# Altium PCB Board.PcbDoc
Units mm, origin at the board's own origin, x right, y up, seen from the top; angles counter-clockwise.
Board outline 142.08 x 55.74 mm, 2 copper layers (Top Layer, Bottom Layer); 54 components, 67 nets, 258 pads, 16 vias.
Unrouted connection lines stored in the file: 171.
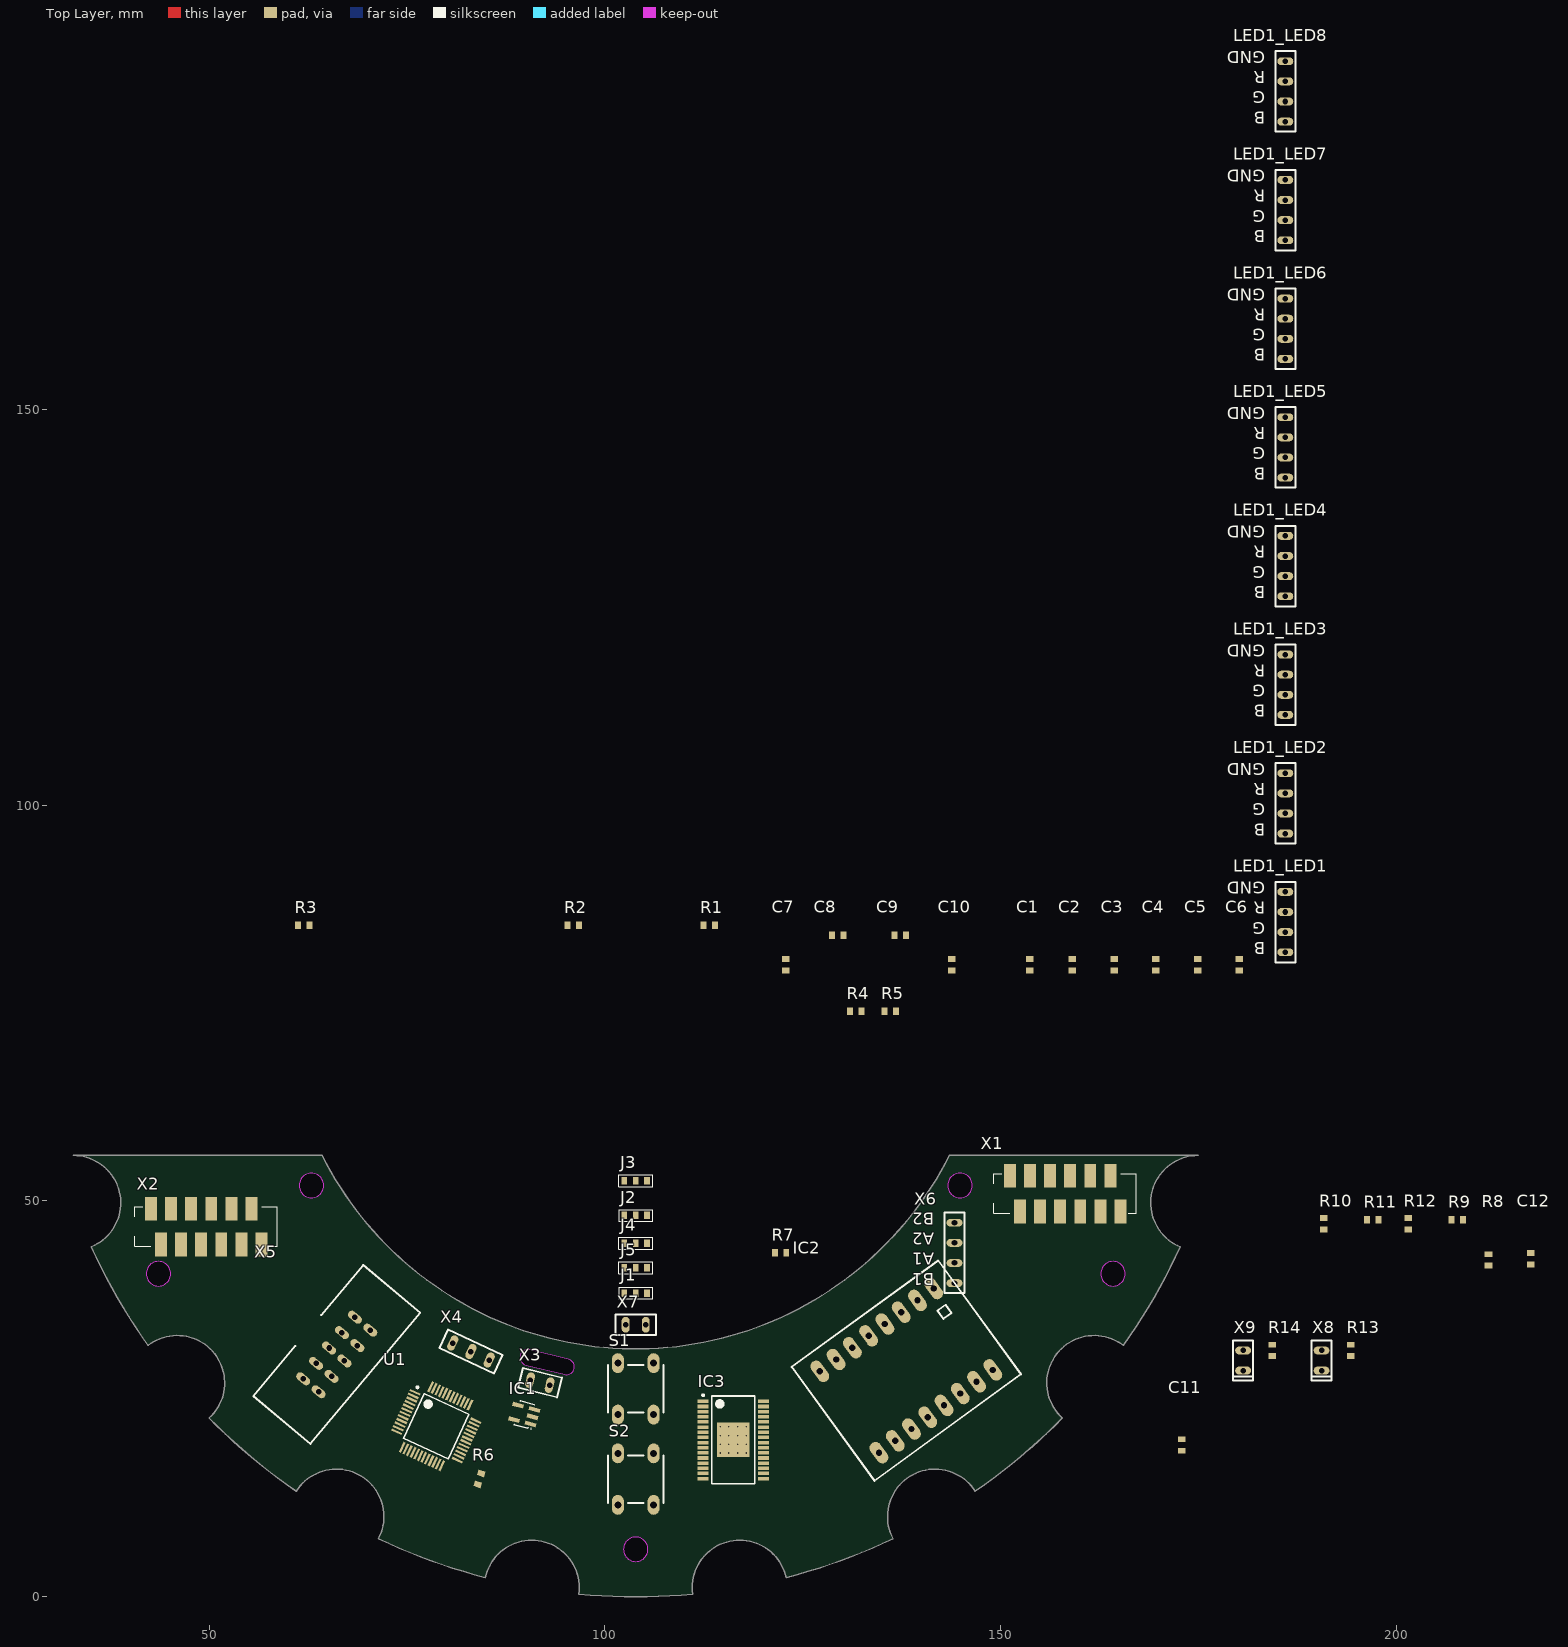
[diagram p0: Top Layer view]
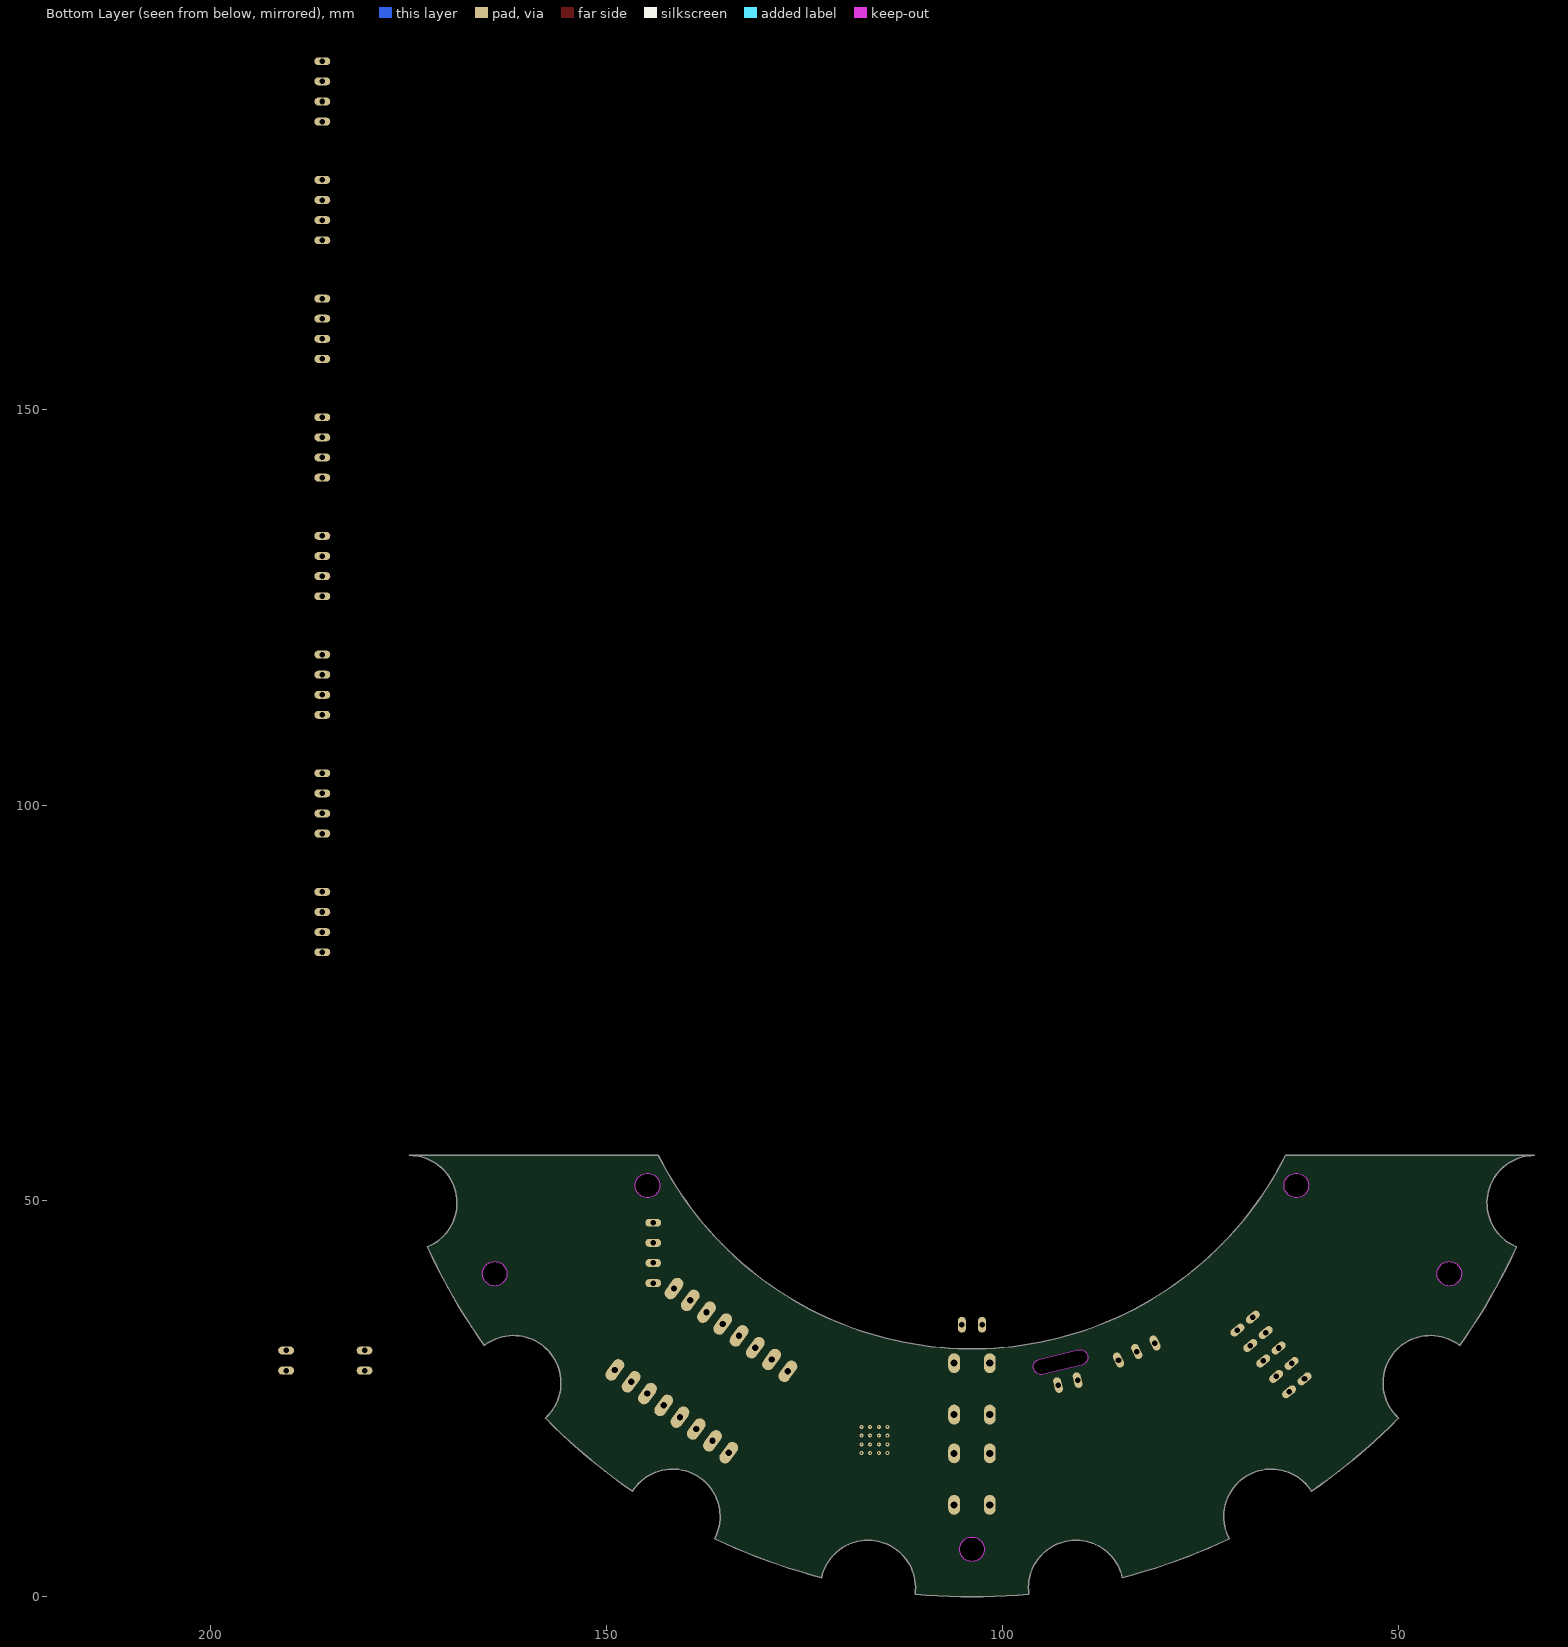
[diagram p1: Bottom Layer view, seen from below]

## Layer stack, top to bottom
Top Solder: solder mask 0.0102, Solder Resist, Dk 3.5
Top Layer: signal copper 0.0356
Dielectric 1: dielectric 0.32, FR-4, Dk 4.8
Bottom Layer: signal copper 0.0356
Bottom Solder: solder mask 0.0102, Solder Resist, Dk 3.5

## Board outline
50.009,22.572 ccw(c103.886,75.606) 61.013,13.339 cw(c66.086,10.135) 71.397,7.343 ccw(c103.886,75.606) 84.895,2.43 cw(c90.758,1.155) 96.704,0.348 ccw(c103.886,75.606) 111.068,0.348 cw(c117.014,1.155) 122.877,2.43 ccw(c103.886,75.606) 136.375,7.343 cw(c141.686,10.135) 146.759,13.339 ccw(c103.886,75.606) 157.763,22.572 cw(c161.799,27.012) 165.47,31.757 ccw(c103.886,75.606) 172.653,44.197 cw(c174.927,49.75) 174.927,55.75 143.487,55.75 cw(c103.886,75.606) 64.285,55.75 32.845,55.75 cw(c32.845,49.75) 35.119,44.197 ccw(c103.886,75.606) 42.302,31.757 cw(c45.973,27.012)
cut-out: 90.041,29.266 94.899,28.084 ccw(c95.135,29.056) 95.372,30.027 90.513,31.209 ccw(c90.277,30.238)
cut-out: 42.061,40.806 ccw(c43.611,40.806) 43.611,39.256 ccw(c43.611,40.806) 45.161,40.806 ccw(c43.611,40.806) 43.611,42.356 ccw(c43.611,40.806)
cut-out: 61.373,51.956 ccw(c62.923,51.956) 62.923,50.406 ccw(c62.923,51.956) 64.473,51.956 ccw(c62.923,51.956) 62.923,53.506 ccw(c62.923,51.956)
cut-out: 102.336,6.006 ccw(c103.886,6.006) 103.886,4.456 ccw(c103.886,6.006) 105.436,6.006 ccw(c103.886,6.006) 103.886,7.556 ccw(c103.886,6.006)
cut-out: 143.299,51.956 ccw(c144.849,51.956) 144.849,50.406 ccw(c144.849,51.956) 146.399,51.956 ccw(c144.849,51.956) 144.849,53.506 ccw(c144.849,51.956)
cut-out: 162.611,40.806 ccw(c164.161,40.806) 164.161,39.256 ccw(c164.161,40.806) 165.711,40.806 ccw(c164.161,40.806) 164.161,42.356 ccw(c164.161,40.806)

## Design rules (kind name [scope] priority, off if disabled: settings)
Clearance [All] p1: gap=0.254
PolygonConnect [All] p1: connectstyle=Relief reliefconductorwidth=0.254 reliefentries=4 polygonreliefangle="90 Angle" airgapwidth=0.254
RoomDefinition Schematic [InComponentClass('Schematic')] p1: confinementstyle=ConfineIn formatcopy=TRUE lockcomponents=FALSE outline 178.943,52.578 399.542,52.578 399.542,78.486 178.943,78.486
RoomDefinition LedLogic [InComponentClass('LedLogic')] p2: confinementstyle=ConfineIn formatcopy=TRUE lockcomponents=FALSE outline 178.943,36.449 219.456,36.449 219.456,51.181 178.943,51.181
RoomDefinition LED8 [InComponentClass('LED8')] p3: confinementstyle=ConfineIn formatcopy=TRUE lockcomponents=FALSE outline 178.943,184.785 192.786,184.785 192.786,198.374 178.943,198.374
RoomDefinition LED7 [InComponentClass('LED7')] p4: confinementstyle=ConfineIn formatcopy=TRUE lockcomponents=FALSE outline 178.943,169.799 192.786,169.799 192.786,183.388 178.943,183.388
RoomDefinition LED6 [InComponentClass('LED6')] p5: confinementstyle=ConfineIn formatcopy=TRUE lockcomponents=FALSE outline 178.943,154.813 192.786,154.813 192.786,168.402 178.943,168.402
RoomDefinition LED5 [InComponentClass('LED5')] p6: confinementstyle=ConfineIn formatcopy=TRUE lockcomponents=FALSE outline 178.943,139.827 192.786,139.827 192.786,153.416 178.943,153.416
RoomDefinition LED4 [InComponentClass('LED4')] p7: confinementstyle=ConfineIn formatcopy=TRUE lockcomponents=FALSE outline 178.943,124.841 192.786,124.841 192.786,138.43 178.943,138.43
RoomDefinition LED3 [InComponentClass('LED3')] p8: confinementstyle=ConfineIn formatcopy=TRUE lockcomponents=FALSE outline 178.943,109.855 192.786,109.855 192.786,123.444 178.943,123.444
RoomDefinition LED2 [InComponentClass('LED2')] p9: confinementstyle=ConfineIn formatcopy=TRUE lockcomponents=FALSE outline 178.943,94.869 192.786,94.869 192.786,108.458 178.943,108.458
RoomDefinition LED1 [InComponentClass('LED1')] p10: confinementstyle=ConfineIn formatcopy=TRUE lockcomponents=FALSE outline 178.943,79.883 192.278,79.883 192.278,93.472 178.943,93.472
RoomDefinition FillLevelSensor [InComponentClass('FillLevelSensor')] p11: confinementstyle=ConfineIn formatcopy=TRUE lockcomponents=FALSE outline 178.943,27.051 197.866,27.051 197.866,35.179 178.943,35.179
RoutingVias [All] p1: holewidth=0.711 width=1.27 viastyle="Through Hole" minholewidth=0.711 minwidth=1.27 maxholewidth=0.711 maxwidth=1.27
SolderMaskExpansion [All] p1: expansion=0.102
UnpouredPolygon [All] p1: allowunpoured=FALSE
Width [All] p1: maxlimit=0.254 minlimit=0.254 preferedwidth=0.254
29 further rules are at their usual default settings.

## Classes and differential pairs
component class FillLevelSensor: R13 R14 X8 X9
component class LED1: LED1_LED1
component class LED2: LED1_LED2
component class LED3: LED1_LED3
component class LED4: LED1_LED4
component class LED5: LED1_LED5
component class LED6: LED1_LED6
component class LED7: LED1_LED7
component class LED8: LED1_LED8
component class LedLogic: C12 IC3 R8 R9 R10 R11 R12
component class Schematic: C1 C2 C3 C4 C5 C6 C7 C8 C9 C10 C11 IC1 IC2 J1 J2 J3 J4 J5 R1 R2 R3 R4 R5 R6 R7 S1 S2 U1 X1 X2 X3 X4 X5 X6 X7
net class B[8..1]: B1 B2 B3 B4 B5 B6 B7 B8
net class G[8..1]: G1 G2 G3 G4 G5 G6 G7 G8
net class R[8..1]: R1 R2 R3 R4 R5 R6 R7 R8
channel class LED: LED1 LED2 LED3 LED4 LED5 LED6 LED7 LED8

## Components (designator, comment, footprint, x,y, rotation, side; value= is the part's Value field where it differs from the comment)
C1 "Cap" "Res 0603" 153.675,79.846 r90 top
C2 "Cap" "Res 0603" 159.009,79.846 r90 top
C3 "Cap" "Res 0603" 164.343,79.846 r90 top
C4 "Cap" "Res 0603" 169.55,79.846 r90 top
C5 "Cap" "Res 0603" 174.884,79.846 r90 top
C6 "Cap" "Res 0603" 180.091,79.846 r90 top
C7 "Cap" "Res 0603" 122.814,79.846 r90 top
C8 "Cap2" "Res 0603" 129.418,83.529 r0 top
C9 "Cap2" "Res 0603" 137.292,83.529 r0 top
C10 "Cap" "Res 0603" 143.769,79.846 r90 top
C11 "Cap" "Res 0603" 172.847,19.177 r90 top
C12 "Cap" "Res 0603" 216.916,42.672 r90 top
IC1 "EXAR SPX5205 3.3V" SO-G5/P.95 89.796,23.021 r75 top
IC2 "A4988 Stepper" "A4988 Stepper" 138.06,28.57 r36 top
IC3 "TLC5947 LED Driver" "TSOP 32Pin" 116.205,19.812 r0 top
J1 "VCC to GND Jumper" "VCC to GND Jumper" 103.886,38.366 r0 top
J2 "VCC to GND Jumper" "VCC to GND Jumper" 103.886,48.166 r0 top
J3 "VCC to GND Jumper" "VCC to GND Jumper" 103.886,52.566 r0 top
J4 "VCC to GND Jumper" "VCC to GND Jumper" 103.886,44.666 r0 top
J5 "VCC to GND Jumper" "VCC to GND Jumper" 103.886,41.566 r0 top
LED1_LED1 "LED 4p" "4p 2.54 pitch LED" 185.928,85.217 r90 top (schematic designator LED1)
LED1_LED2 "LED 4p" "4p 2.54 pitch LED" 185.928,100.203 r90 top (schematic designator LED1)
LED1_LED3 "LED 4p" "4p 2.54 pitch LED" 185.928,115.189 r90 top (schematic designator LED1)
LED1_LED4 "LED 4p" "4p 2.54 pitch LED" 185.928,130.175 r90 top (schematic designator LED1)
LED1_LED5 "LED 4p" "4p 2.54 pitch LED" 185.928,145.161 r90 top (schematic designator LED1)
LED1_LED6 "LED 4p" "4p 2.54 pitch LED" 185.928,160.147 r90 top (schematic designator LED1)
LED1_LED7 "LED 4p" "4p 2.54 pitch LED" 185.928,175.133 r90 top (schematic designator LED1)
LED1_LED8 "LED 4p" "4p 2.54 pitch LED" 185.928,190.119 r90 top (schematic designator LED1)
R1 "10k" "Res 0603" 113.162,84.799 r0 top
R2 "10k" "Res 0603" 96.017,84.799 r0 top
R3 "10k" "Res 0603" 61.981,84.799 r0 top
R4 "10k" "Res 0603" 131.69,73.96 r0 top
R5 "10k" "Res 0603" 136.008,73.96 r0 top
R6 "10k" "Res 0603" 84.158,14.891 r252 top
R7 "10k" "Res 0603" 122.174,43.434 r0 top
R8 "Res2" "Res 0603" 211.582,42.545 r90 top
R9 "10k" "Res 0603" 207.645,47.625 r0 top
R10 "10k" "Res 0603" 190.754,47.117 r90 top
R11 "10k" "Res 0603" 196.977,47.625 r0 top
R12 "10k" "Res 0603" 201.422,47.117 r90 top
R13 "10k" "Res 0603" 194.183,31.115 r90 top
R14 "10k" "Res 0603" 184.277,31.115 r90 top
S1 "Taster" Taster 103.886,26.266 r0 top
S2 "Taster" Taster 103.886,14.866 r0 top
U1 "STM32F042C6T6" LQFP48 78.681,21.554 r335 top
X1 "OUT" "12P WURTH 690 367 28 12 76" 158.115,50.927 r180 top
X2 "IN" "12P WURTH 690 367 28 12 76" 49.638,46.762 r180 top
X3 "2p Connector" "2p 2.54 pitch" 91.78,27.053 r346 top
X4 "UART" "3p 2.54 pitch" 83.076,30.98 r335 top
X5 "Wannenstecker 10p" "Wannenstecker 10p" 66.129,30.609 r230 top
X6 "4p Connector" "4p 2.54 pitch Motor Connector" 144.145,43.434 r90 top
X7 "2p Connector" "2p 2.54 pitch" 103.886,34.366 r0 top
X8 "2p Connector" "2p 2.54 pitch, diode" 190.5,29.845 r90 top
X9 "2p Connector" "2p 2.54 pitch, diode" 180.594,29.845 r90 top

## Footprints (in the part's own frame and the unit in brackets; to place one, negate y for a bottom-side part, rotate by r counter-clockwise, add the part's x,y. Pads: shape width x height; smd on the part's side, far side on the other; paste and mask are expansions set on the pad)
"2p 2.54 pitch" [mm]
  oval 1x2 hole 0.7: 1(1.27,0) 2(-1.27,0)
  silkscreen extent -2.54,-1.27 2.54,1.27
"2p 2.54 pitch, diode" [mm]
  oval 1x2 hole 0.7: 1(1.27,0) 2(-1.27,0)
  silkscreen extent -2.54,-1.27 2.54,1.27
"3p 2.54 pitch" [mm]
  oval 1x2 hole 0.7: 1(2.54,0) 2(0,0) 3(-2.54,0)
  silkscreen extent -3.81,-1.27 3.81,1.27
"4p 2.54 pitch LED" [mm]
  oval 1x2 hole 0.7: 1(3.81,0) 2(1.27,0) 3(-1.27,0) 4(-3.81,0)
  silkscreen extent -5.08,-1.27 5.08,1.27
"4p 2.54 pitch Motor Connector" [mm]
  oval 1x2 hole 0.7: 1(3.81,0) 2(1.27,0) 3(-1.27,0) 4(-3.81,0)
  silkscreen extent -5.08,-1.27 5.08,1.27
"12P WURTH 690 367 28 12 76" [mm]
  rect 1.5x3 smd: 1(-5.715,-2.25) 2(-6.985,2.25) 3(-3.175,-2.25) 4(-4.445,2.25) 5(-0.635,-2.25) 6(-1.905,2.25) 7(1.905,-2.25) 8(0.635,2.25) 9(4.445,-2.25) 10(3.175,2.25) 11(6.985,-2.25) 12(5.715,2.25)
  silkscreen extent -9,-2.5 9,2.5
"A4988 Stepper" [mm] "Stepper Driver"
  oval 1.5x3 hole 0.8: 1(8.89,6.35) 2(6.35,6.35) 3(3.81,6.35) 4(1.27,6.35) 5(-1.27,6.35) 6(-3.81,6.35) 7(-6.35,6.35) 8(-8.89,6.35) 9(-8.89,-6.35) 10(-6.35,-6.35) 11(-3.81,-6.35) 12(-1.27,-6.35) 13(1.27,-6.35) 14(3.81,-6.35) 15(6.35,-6.35) 16(8.89,-6.35)
  silkscreen extent -11.43,-8.89 11.43,8.89
LQFP48 [mm] "LQFP, 48-Leads, Body 7.00x7.00mm, STM32F042C6T6"
  rect 1.45x0.3 smd: 1(-4.225,2.75) 2(-4.225,2.25) 3(-4.225,1.75) 4(-4.225,1.25) 5(-4.225,0.75) 6(-4.225,0.25) 7(-4.225,-0.25) 8(-4.225,-0.75) 9(-4.225,-1.25) 10(-4.225,-1.75) 11(-4.225,-2.25) 12(-4.225,-2.75) 25(4.225,-2.75) 26(4.225,-2.25) 27(4.225,-1.75) 28(4.225,-1.25) 29(4.225,-0.75) 30(4.225,-0.25) 31(4.225,0.25) 32(4.225,0.75) 33(4.225,1.25) 34(4.225,1.75) 35(4.225,2.25) 36(4.225,2.75)
  rect 0.3x1.45 smd: 13(-2.75,-4.225) 14(-2.25,-4.225) 15(-1.75,-4.225) 16(-1.25,-4.225) 17(-0.75,-4.225) 18(-0.25,-4.225) 19(0.25,-4.225) 20(0.75,-4.225) 21(1.25,-4.225) 22(1.75,-4.225) 23(2.25,-4.225) 24(2.75,-4.225) 37(2.75,4.225) 38(2.25,4.225) 39(1.75,4.225) 40(1.25,4.225) 41(0.75,4.225) 42(0.25,4.225) 43(-0.25,4.225) 44(-0.75,4.225) 45(-1.25,4.225) 46(-1.75,4.225) 47(-2.25,4.225) 48(-2.75,4.225)
  silkscreen extent -4.35,-3.1 3.1,3.57, body extent -3.5,-3.5 3.5,3.5, height 1.6
"Res 0603" [mm] "Chip Resistor, 2-Leads, 0603, IPC Medium Density"
  rect 0.75x0.95 smd: 1(-0.725,0) 2(0.725,0)
  body extent -0.85,-0.45 0.85,0.45, height 0.55
SO-G5/P.95 [mm] "SOT-23/SC-74A; 5 Leads; Body 3.1 x 3 mm, inc. leads (LxW max)"
  rect 0.55x1.45 smd: 1(-0.95,-1.075) 2(0,-1.075) 3(0.95,-1.075) 4(0.95,1.075) 5(-0.95,1.075)
  silkscreen extent -1.58,-1.35 1.55,0.9
Taster [mm]
  oval 1.5x2.5 hole 0.9: 1(2.25,3.25) 2(-2.25,3.25) 3(-2.25,-3.25) 4(2.25,-3.25)
  silkscreen extent -3.5,-3 3.5,3
"TSOP 32Pin" [mm] "TSOP, 32-Leads, TLC5947, Body 11.00x6.10mm, Pitch 0.65mm, Thermal Pad 4.36x4.11mm, IPC Medium Density"
  rect 1.4x0.45 smd: 1(-3.8,4.875) 2(-3.8,4.225) 3(-3.8,3.575) 4(-3.8,2.925) 5(-3.8,2.275) 6(-3.8,1.625) 7(-3.8,0.975) 8(-3.8,0.325) 9(-3.8,-0.325) 10(-3.8,-0.975) 11(-3.8,-1.625) 12(-3.8,-2.275) 13(-3.8,-2.925) 14(-3.8,-3.575) 15(-3.8,-4.225) 16(-3.8,-4.875) 17(3.8,-4.875) 18(3.8,-4.225) 19(3.8,-3.575) 20(3.8,-2.925) 21(3.8,-2.275) 22(3.8,-1.625) 23(3.8,-0.975) 24(3.8,-0.325) 25(3.8,0.325) 26(3.8,0.975) 27(3.8,1.625) 28(3.8,2.275) 29(3.8,2.925) 30(3.8,3.575) 31(3.8,4.225) 32(3.8,4.875)
  rect 4.11x4.36 smd: 33(0,0)
  silkscreen extent -3.92,-5.55 2.7,5.77, body extent -3.1,-5.55 3.1,5.55, height 1.2
"VCC to GND Jumper" [mm]
  rect 0.75x0.95 smd: 1(-1.45,0) 2(1.45,0) 3(0,0)
  silkscreen extent -2.18,-0.75 2.18,0.75
"Wannenstecker 10p" [mm] "Connector, 10p"
  oval 1x2 hole 0.7: 1(-5.08,-1.27) 2(-5.08,1.27) 3(-2.54,-1.27) 4(-2.54,1.27) 5(0,-1.27) 6(0,1.27) 7(2.54,-1.27) 8(2.54,1.27) 9(5.08,-1.27) 10(5.08,1.27)
  silkscreen extent -10.8,-4.7 10.8,4.7

## Part data
C1 C2 C3 C4 C5 C6 C7 C8 C9 C10 C11 C12: "Capacitor"
R1 R2 R3 R4 R5 R6 R7 R9 R10 R11 R12 R13 R14: library part Res
R8: "Resistor"
X1 X2: library part "12p Connector"
X4: library part "3p Connector"

## Via types
v1: diameter 0.5, hole 0.2, Top Layer to Bottom Layer, 16 vias

## Nets (pads, with @x,y where several pads share a name; then routed paths per layer and width w, separated by ;. In a path a pad name is that pad's centre, name@x,y a point inside that pad or via, vN(x,y) a via of type N, cw(c..) or ccw(c..) an arc to the next point about the centre after c; other vN are vias at no path point)
1A_1: IC2.12 X6.3
1B_1: IC2.11 X6.4
2A_1: IC2.13 X6.2
2B_1: IC2.14 X6.1
3V3: C1.2 C2.2 C3.2 C4.2 C5.2 C6.2 C9.1 C10.2 C12.2 IC1.5 IC2.10 IC3.32 J1.2 J2.2 J3.2 J4.2 J5.2 LED1_LED1.1 LED1_LED2.1 LED1_LED3.1 LED1_LED4.1 LED1_LED5.1 LED1_LED6.1 LED1_LED7.1 LED1_LED8.1 R1.2 R2.2 R3.2 R6.2 R7.2 R8.2 R13.2 R14.2 U1.1 U1.9 U1.24 U1.36 U1.48 X1.3 X2.3 X5.1
/EN_1: IC2.1 R3.1 U1.18 X2.9
/EN_2: U1.39 X1.9
B1: IC3.7 LED1_LED1.4
B2: IC3.10 LED1_LED2.4
B3: IC3.13 LED1_LED3.4
B4: IC3.16 LED1_LED4.4
B5: IC3.19 LED1_LED5.4
B6: IC3.22 LED1_LED6.4
B7: IC3.25 LED1_LED7.4
B8: IC3.28 LED1_LED8.4
BLANK_1: IC3.2 R12.1 U1.16 X2.6
BLANK_2: U1.27 X1.6
DIR_1: IC2.8 R5.2 U1.20 X2.5
DIR_2: U1.41 X1.5
EST_1: R7.1 U1.29 X2.12 X7.2
EST_2: U1.22 X1.12
FILLED: U1.33 X1.11 X2.11 X8.2
G1: IC3.6 LED1_LED1.3
G2: IC3.9 LED1_LED2.3
G3: IC3.12 LED1_LED3.3
G4: IC3.15 LED1_LED4.3
G5: IC3.18 LED1_LED5.3
G6: IC3.21 LED1_LED6.3
G7: IC3.24 LED1_LED7.3
G8: IC3.27 LED1_LED8.3
GND: C1.1 C2.1 C3.1 C4.1 C5.1 C6.1 C7.1 C8.2 C9.2 C10.1 C11.1 C12.1 IC1.2 IC2.9 IC2.15 IC3.1 J1.1 J2.1 J3.1 J4.1 J5.1 R4.1 R5.1 R9.2 R10.2 R11.2 R12.2 S1.2 S1.3 S2.2 S2.3 U1.8 U1.23 U1.35 U1.47 X1.2 X2.2 X3.1 X4.1 X5.3 X5.5 X5.9 X7.1
NetIC2_2: IC2.2 J5.3
NetIC2_3: IC2.3 J4.3
NetIC2_4: IC2.4 J3.3
NetIC2_5: IC2.5 J2.3
NetIC2_6: IC2.6 J1.3
NetIC3_29: IC3.29
NetIC3_31: IC3.31 R8.1
NetR1_1: R1.1 S1.1 S1.4
NetR2_1: R2.1 S2.1 S2.4
NetR13_1: R13.1 X8.1
NetR14_1: R14.1 X9.1
NON: X9.2
NON_1: U1.32
NRST: R6.1 U1.7 X5.10
R1: IC3.5 LED1_LED1.2
R2: IC3.8 LED1_LED2.2
R3: IC3.11 LED1_LED3.2
R4: IC3.14 LED1_LED4.2
R5: IC3.17 LED1_LED5.2
R6: IC3.20 LED1_LED6.2
R7: IC3.23 LED1_LED7.2
R8: IC3.26 LED1_LED8.2
S1: U1.10
SPI1_MOSI: IC3.4 R10.1 U1.17 X2.4
SPI1_SCK: IC3.3 R11.1 U1.15 X2.8
SPI1_XLAT: IC3.30 R9.1 U1.14 X2.10
SPI2_MOSI: U1.28 X1.4
SPI2_SCK: U1.26 X1.8
SPI2_XLAT: U1.25 X1.10
STEP_1: IC2.7 R4.2 U1.19 X2.7
STEP_2: U1.40 X1.7
SWCLK: U1.37 X5.4
SWDIO: U1.34 X5.2
UART_RX: U1.31 X4.3
UART_TX: U1.30 X4.2
VMOT: C7.2 C8.1 C11.2 IC1.1 IC1.3 IC2.16 X1.1 X2.1 X3.2
pads on no net: IC1.4 IC3.33 U1.2 U1.3 U1.4 U1.5 U1.6 U1.11 U1.12 U1.13 U1.21 U1.38 U1.42 U1.43 U1.44 U1.45 U1.46 X5.6 X5.7 X5.8
copper on no net:
  other v1: 114.555,18.162 115.655,18.162 116.755,18.162 117.855,18.162 114.555,19.262 115.655,19.262 116.755,19.262 117.855,19.262 114.555,20.362 115.655,20.362 116.755,20.362 117.855,20.362 114.555,21.462 115.655,21.462 116.755,21.462 117.855,21.462

## Silkscreen, mask and mechanical layers (free items; w line width, h text height)
Mechanical 1:
  circle w0.013: c144.849,51.956 r1.55
  circle w0.013: c62.923,51.956 r1.55
  circle w0.013: c43.611,40.806 r1.55
  circle w0.013: c103.886,6.006 r1.55
  circle w0.013: c164.161,40.806 r1.55
  lines w0.013: 32.845,55.75 cw(c32.845,49.75) 35.119,44.197 ccw(c103.886,75.606) 42.302,31.757 cw(c45.973,27.012) 50.009,22.572 ccw(c103.886,75.606) 61.013,13.339 cw(c66.086,10.135) 71.397,7.343 ccw(c103.886,75.606) 84.895,2.43 cw(c90.758,1.155) 96.704,0.348 ccw(c103.886,75.606) 111.068,0.348 cw(c117.014,1.155) 122.877,2.43 ccw(c103.886,75.606) 136.375,7.343 cw(c141.686,10.135) 146.759,13.339 ccw(c103.886,75.606) 157.763,22.572 cw(c161.799,27.012) 165.47,31.757 ccw(c103.886,75.606) 172.653,44.197 cw(c174.927,49.75) 174.927,55.75 143.487,55.75 cw(c103.886,75.606) 64.285,55.75 32.845,55.75 ; 42.976,50.587 cw(c42.976,52.087) 42.976,53.587 56.773,53.587 cw(c56.773,52.087) 56.773,50.587 42.976,50.587 ; 90.041,29.266 cw(c90.277,30.238) 90.513,31.209 95.372,30.027 cw(c95.135,29.056) 94.899,28.084 90.041,29.266 ; 150.999,50.587 cw(c150.999,52.087) 150.999,53.587 164.796,53.587 cw(c164.796,52.087) 164.796,50.587 150.999,50.587

## Text inside footprints (layer, text, board x,y; h text height)
LED1_LED1: Top Overlay "B" at 183.388,82.677 h1.52 r180; Top Overlay "G" at 183.388,85.217 h1.52 r180; Top Overlay "R" at 183.388,87.757 h1.52 r180; Top Overlay "GND" at 183.388,90.297 h1.52 r180
LED1_LED2: Top Overlay "B" at 183.388,97.663 h1.52 r180; Top Overlay "G" at 183.388,100.203 h1.52 r180; Top Overlay "R" at 183.388,102.743 h1.52 r180; Top Overlay "GND" at 183.388,105.283 h1.52 r180
LED1_LED3: Top Overlay "B" at 183.388,112.649 h1.52 r180; Top Overlay "G" at 183.388,115.189 h1.52 r180; Top Overlay "R" at 183.388,117.729 h1.52 r180; Top Overlay "GND" at 183.388,120.269 h1.52 r180
LED1_LED4: Top Overlay "B" at 183.388,127.635 h1.52 r180; Top Overlay "G" at 183.388,130.175 h1.52 r180; Top Overlay "R" at 183.388,132.715 h1.52 r180; Top Overlay "GND" at 183.388,135.255 h1.52 r180
LED1_LED5: Top Overlay "B" at 183.388,142.621 h1.52 r180; Top Overlay "G" at 183.388,145.161 h1.52 r180; Top Overlay "R" at 183.388,147.701 h1.52 r180; Top Overlay "GND" at 183.388,150.241 h1.52 r180
LED1_LED6: Top Overlay "B" at 183.388,157.607 h1.52 r180; Top Overlay "G" at 183.388,160.147 h1.52 r180; Top Overlay "R" at 183.388,162.687 h1.52 r180; Top Overlay "GND" at 183.388,165.227 h1.52 r180
LED1_LED7: Top Overlay "B" at 183.388,172.593 h1.52 r180; Top Overlay "G" at 183.388,175.133 h1.52 r180; Top Overlay "R" at 183.388,177.673 h1.52 r180; Top Overlay "GND" at 183.388,180.213 h1.52 r180
LED1_LED8: Top Overlay "B" at 183.388,187.579 h1.52 r180; Top Overlay "G" at 183.388,190.119 h1.52 r180; Top Overlay "R" at 183.388,192.659 h1.52 r180; Top Overlay "GND" at 183.388,195.199 h1.52 r180
X6: Top Overlay "B1" at 141.605,40.894 h1.52 r180; Top Overlay "A1" at 141.605,43.434 h1.52 r180; Top Overlay "A2" at 141.605,45.974 h1.52 r180; Top Overlay "B2" at 141.605,48.514 h1.52 r180